# Altium PCB MoveH Messkette einseitig V2.PcbDoc
Units mm, origin at the board's own origin, x right, y up, seen from the top; angles counter-clockwise.
Board outline 66 x 63 mm, 2 copper layers (Top Layer, Bottom Layer); 70 components, 54 nets, 294 pads, 130 vias.
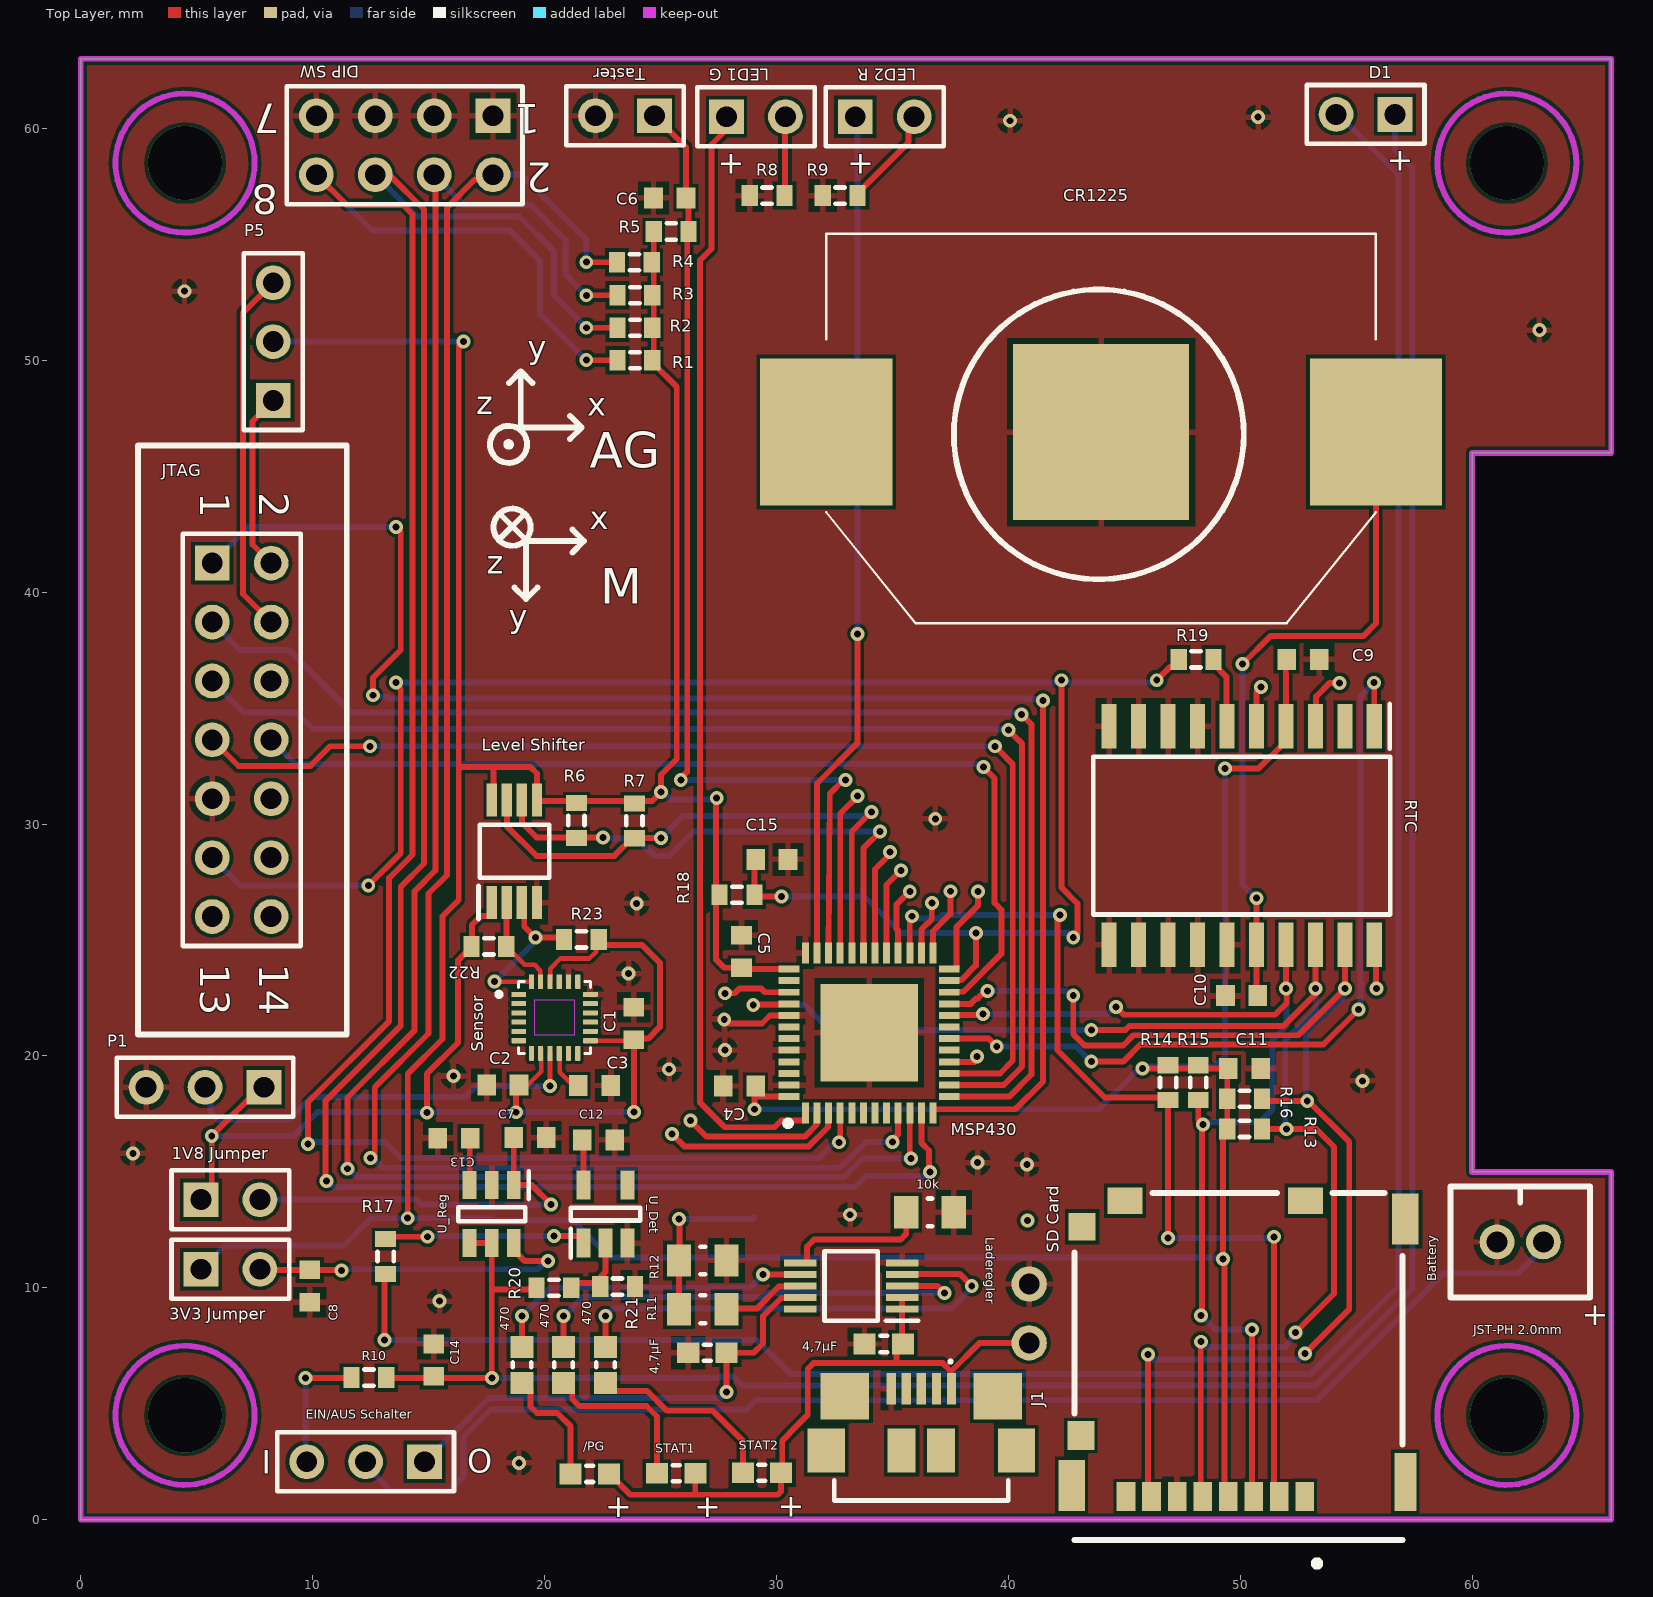
[diagram p0: Top Layer view]
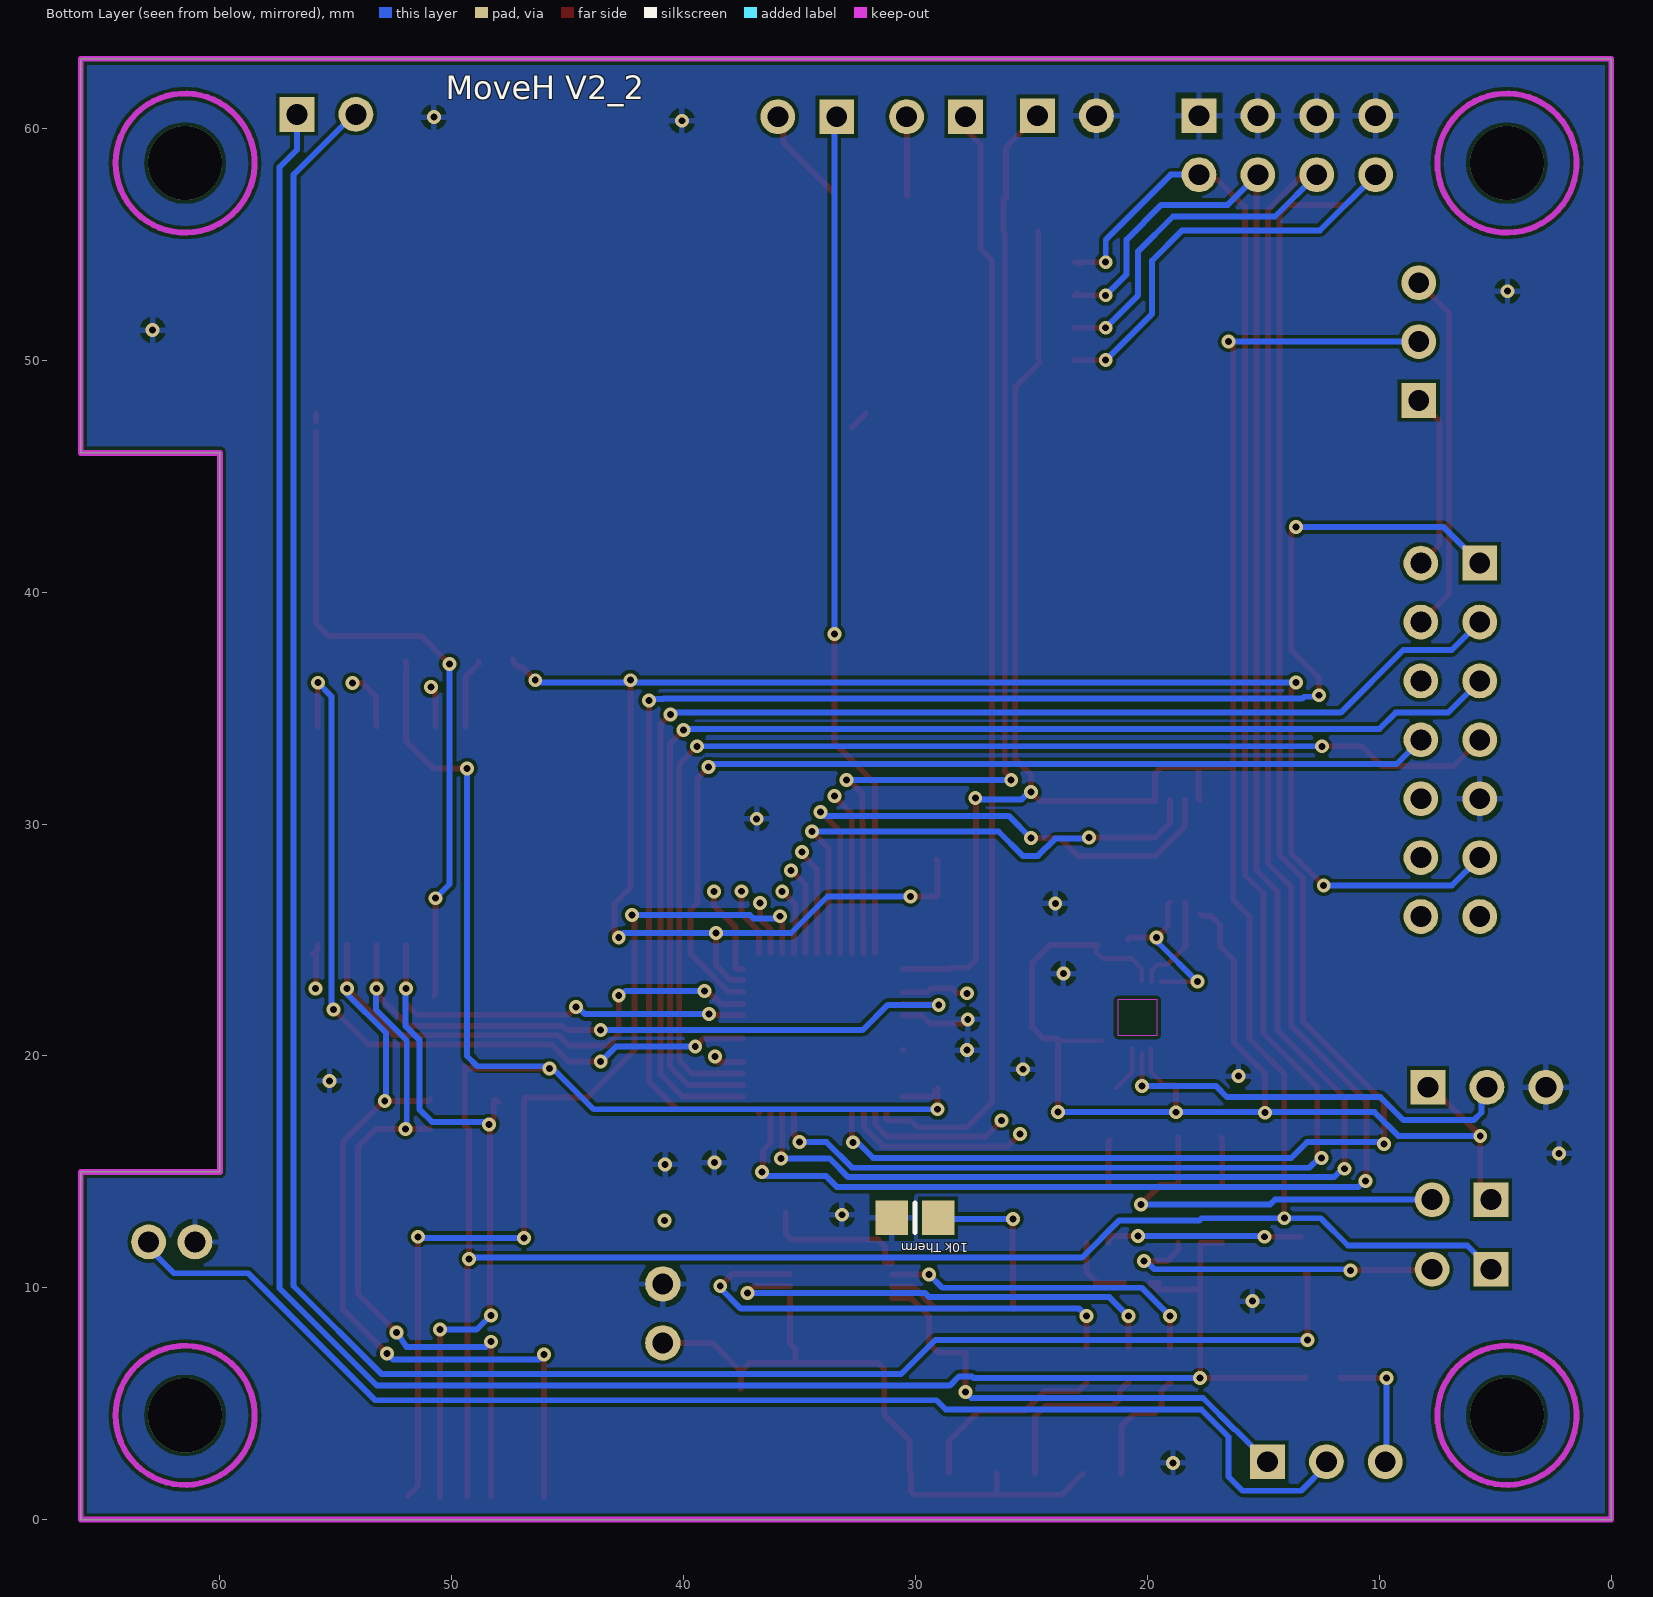
[diagram p1: Bottom Layer view, seen from below]

## Layer stack, top to bottom
Top Solder: solder mask 0.0102, Solder Resist, Dk 3.5
Top Layer: signal copper 0.0356
Dielectric 1: dielectric 0.32, FR-4, Dk 4.8
Bottom Layer: signal copper 0.0356
Bottom Solder: solder mask 0.0102, Solder Resist, Dk 3.5

## Board outline
60,15 66,15 66,0 0,0 0,63 66,63 66,46 60,46

## Design rules (kind name [scope] priority, off if disabled: settings)
Clearance [All] p1: gap=0.15 ignorepadtopadclearanceinfootprint=TRUE except(0.254: Arc-Via Track-Via)
HoleSize [All] p1: absolutevalues=TRUE maxlimit=3.3 minlimit=0.025 maxpercent=80.000 minpercent=20.000
MinimumSolderMaskSliver [All] p1: minsoldermaskwidth=0.04
PolygonConnect [All] p1: connectstyle=Relief reliefconductorwidth=0.254 reliefentries=4 polygonreliefangle="90 Angle" airgapwidth=0.254
RoutingVias [All] p1: holewidth=0.3 width=0.6 viastyle="Through Hole" minholewidth=0.3 minwidth=0.6 maxholewidth=0.3 maxwidth=0.6
SilkToSilkClearance [All] p1: silktosilkclearance=0.1
SilkToSolderMaskClearance [IsPad] p1: minsilkscreentomaskgap=0.1 clearancetoexposedcopper=TRUE
SolderMaskExpansion [All] p1: expansion=0.102
Width [All] p1: maxlimit=0.254 minlimit=0.2 preferedwidth=0.254
26 further rules are at their usual default settings.

## Classes and differential pairs
component class "POWER MANAGEMENT": "1V8 Jumper" "3V3 Jumper" 4,7µF 10k "10k Therm" 470 /PG Battery C7 C8 C12 C13 C14 D1 "EIN/AUS Schalter" J1 Laderegler R10 R11 R12 R17 R20 R21 STAT1 STAT2 U_Det U_Reg

## Components (designator, comment, footprint, x,y, rotation, side; value= is the part's Value field where it differs from the comment)
"1V8 Jumper" "Header 2" HDR1X2 5.185,13.8 r0 top
"3V3 Jumper" "Header 2" HDR1X2 5.185,10.8 r0 top
4,7µF "VJ0603" VJ0603 27.023,7.197 r180 top
4,7µF "VJ0603" VJ0603 34.623,7.577 r180 top
10k "RES 0805" D12CRCW0805 36.623,13.252 r180 top
"10k Therm" "10k Therm" 6-0805_M 30.025,13.025 r180 bottom value=1K
470 "RES 0603" "Vishay D11/CRCW0603 Resistor" 19.023,6.677 r90 top
470 "RES 0603" "Vishay D11/CRCW0603 Resistor" 22.623,6.677 r90 top
470 "RES 0603" "Vishay D11/CRCW0603 Resistor" 20.823,6.677 r90 top
/PG "LED SMD 0603" "SMD LED 0603" 21.95,1.975 r180 top
Battery "Header 2H" "JST-PH 2-Pin 2.0mm" 62.075,11.975 r180 top
C1 "Cap" 1608[0603] 23.85,21.4 r270 top value=100nF
C2 "Cap" 1608[0603] 18.2,18.745 r180 top value=100nF
C3 "Cap" 1608[0603] 22.15,18.725 r0 top value=100nF
C4 "Cap" 1608[0603] 28.4,18.7 r0 top value=100nF
C5 "Cap" 1608[0603] 28.5,24.5 r270 top value=100nF
C6 "Cap" 1608[0603] 25.4,57 r0 top value=40nF
C7 "Cap" 1608[0603] 19.375,16.475 r180 top value=2.2µF
C8 "Cap" 1608[0603] 9.875,10.077 r90 top value=2.2µF
C9 "Cap" 1608[0603] 52.7,37.1 r180 top value=100nF
C10 "Cap" 1608[0603] 50.065,22.6 r180 top value=100nF
C11 "Cap" 1608[0603] 50.19,19.45 r180 top value=100nF
C12 "Cap" 1608[0603] 22.323,16.377 r180 top value=100nF
C13 "Cap" 1608[0603] 16.1,16.45 r0 top value=10nF
C14 "Cap" 1608[0603] 15.223,6.877 r270 top value=2.2µF
C15 "Cap" 1608[0603] 29.8,28.475 r180 top value=2.2nF
CR1225 "12BH022-GR" 12BH022GR 44,46.9 r0 top
D1 "LED2" HDR1X2 56.675,60.6 r180 top
"DIP SW" "Header 4X2" HDR2X4 17.78,60.54 r180 top
"EIN/AUS Schalter" "EIN/AUS Schalter" HDR1X3 14.825,2.5 r180 top
J1 "ZX62R-B-5P_30_" ZX62R-B-5P(30) 36.25,0.825 r0 top
JTAG "Header 7X2" HDR2X7 5.671,41.249 r270 top
Laderegler "MCP73833-AMI_UN" SOP50P490X110-10N 33.223,10.077 r180 top
"LED1 G" "Header 2" HDR1X2 27.848,60.5 r0 top
"LED2 R" "Header 2" HDR1X2 33.4,60.5 r0 top
"Level Shifter" "PCA9508DP,118" SOP65P490X110-8N 18.7,28.825 r90 top
MSP430 "MSP430FR5969IRGZR" QFN50P700X700X100-49N-D 34,20.995 r90 top
P1 "Header 3" HDR1X3 7.9,18.65 r180 top
P5 "Header 3" HDR1X3 8.3,48.26 r90 top
R1 "Res3" J1-0603 23.9,50 r180 top value=10K
R2 "Res3" J1-0603 23.9,51.4 r180 top value=10K
R3 "Res3" J1-0603 23.9,52.8 r180 top value=10K
R4 "Res3" J1-0603 23.873,54.225 r180 top value=10K
R5 "Res3" J1-0603 25.463,55.552 r180 top value=100K
R6 "Res3" J1-0603 21.375,30.15 r270 top value=2K
R7 "Res3" J1-0603 23.875,30.14 r270 top value=2K
R8 "Res3" J1-0603 29.6,57.1 r180 top value=330
R9 "Res3" J1-0603 32.75,57.1 r180 top value=330
R10 "10" J1-0603 12.423,6.127 r180 top
R11 "RES 0805" D12CRCW0805 26.823,9.077 r0 top value=12k
R12 "RES 0805" D12CRCW0805 26.823,11.177 r180 top value=12k
R13 "Res3" J1-0603 50.19,16.85 r180 top value=10K
R14 "Res3" J1-0603 46.89,18.85 r90 top value=10K
R15 "Res3" J1-0603 48.19,18.85 r270 top value=10K
R16 "Res3" J1-0603 50.19,18.15 r0 top value=10K
R17 "Res3" J1-0603 13.15,11.35 r90 top value=330
R18 "Res3" J1-0603 28.3,26.95 r180 top value=47k
R19 "Res3" J1-0603 48.1,37.1 r0 top value=0
R20 "Res3" J1-0603 20.4,10 r0 top value=650
R21 "Res3" J1-0603 23.15,10.05 r180 top value=1K
R22 "Res3" J1-0603 17.6,24.725 r180 top value=2K
R23 "Res3" J1-0603 21.586,25.025 r0 top value=2K
RTC "DS3234S#" SOIC127P1032X265-20N 50.065,29.5 r270 top
"SD Card" "503182-1852" 5031821852 49.925,1.63 r180 top
Sensor "ICM-20948" QFN40P300X300X105-24N 20.434,21.655 r0 top
STAT1 "LED SMD 0603" "SMD LED 0603" 25.675,2 r180 top
STAT2 "LED SMD 0603" "SMD LED 0603" 29.375,2.025 r180 top
Taster "Header 2" HDR1X2 24.74,60.54 r180 top
U_Det "NCP302LSN20T1G" SOT95P275X110-5N 22.623,13.177 r90 top
U_Reg "MAX8882EUTA5+T" SOT95P280X145-6N 17.723,13.177 r270 top

## Footprints (in the part's own frame and the unit in brackets; to place one, negate y for a bottom-side part, rotate by r counter-clockwise, add the part's x,y. Pads: shape width x height; smd on the part's side, far side on the other; paste and mask are expansions set on the pad)
6-0805_M [mm] "Chip Resistor, Body 2.0x1.2mm, IPC Low Density"
  rect 1.4x1.5 smd: 1(-1,0) 2(1,0)
  silkscreen extent 0,-0.65 0,0.65, body extent -1.07,-0.7 1.07,0.7, height 0.7
12BH022GR [mm]
  rect 5.7x6.35 smd: 1(-11.85,0) 2(11.85,0)
  rect 7.6x7.6 smd: 3(0,0)
  silkscreen extent -11.85,-8.25 11.85,8.55, body extent -14.13,-8.25 14.13,8.55, height 4.1
1608[0603] [mm] "Chip Capacitor, Body 1.6x0.8mm, IPC High Density"
  rect 0.8x0.9 smd: 1(-0.7,0) 2(0.7,0)
  body extent -0.87,-0.48 0.87,0.48, height 1.3
5031821852 [mm]
  rect 0.8x1.24 smd: 1(-2.85,0.63) 2(-1.75,0.63) 3(-0.65,0.63) 4(0.45,0.63) 5(1.55,0.63) 6(2.65,0.63) 7(3.75,0.63) 8(4.85,0.63)
  rect 0.95x2.5 smd: 9(-7.195,0)
  rect 1.15x2.2 smd: 10(7.195,0.15) 15(-7.195,-11.33)
  rect 1.16x1.25 smd: 11(6.795,-2)
  rect 1.16x1.2 smd: 12(6.74,-11)
  rect 1.5x1.15 smd: 13(4.89,-12.125) 14(-2.89,-12.125)
  silkscreen extent -7.07,-12.45 7.07,3.66, body extent -7.47,-12.5 7.47,2.45, height 1.48
D12CRCW0805 [mm] "Chip Resistor, 2-Leads, Body 2,1x1,3mm, IPC Medium Density"
  rect 1.05x1.4 smd: 1(-1.025,0) 2(1.025,0)
  silkscreen extent -0.1,-0.6 0.1,0.6, body extent -1.1,-0.71 1.1,0.71, height 0.51
HDR1X2 [mm] "Connector; Header; 2 Position"
  rect 1.5x1.5 hole 0.9: 1(0,0)
  round 1.5 hole 0.9: 2(2.54,0)
  silkscreen extent -1.27,-1.27 3.81,1.27
HDR1X3 [mm] "Connector; Header; 3 Position"
  rect 1.5x1.5 hole 0.9: 1(0,0)
  round 1.5 hole 0.9: 2(2.54,0) 3(5.08,0)
  silkscreen extent -1.27,-1.27 6.35,1.27
HDR2X4 [mm] "Connector; Header; 4x2 Position"
  rect 1.5x1.5 hole 0.9: 1(0,0)
  round 1.5 hole 0.9: 2(0,2.54) 3(2.54,0) 4(2.54,2.54) 5(5.08,0) 6(5.08,2.54) 7(7.62,0) 8(7.62,2.54)
  silkscreen extent -1.27,-1.27 8.89,3.81
HDR2X7 [mm] "Connector; Header; 7x2 Position"
  rect 1.5x1.5 hole 0.9: 1(0,0)
  round 1.5 hole 0.9: 2(0,2.54) 3(2.54,0) 4(2.54,2.54) 5(5.08,0) 6(5.08,2.54) 7(7.62,0) 8(7.62,2.54) 9(10.16,0) 10(10.16,2.54) 11(12.7,0) 12(12.7,2.54) 13(15.24,0) 14(15.24,2.54)
  silkscreen extent -1.27,-1.27 16.51,3.81
J1-0603 [mm] "Chip Resistor, Body 1.6x0.8mm, IPC High Density"
  rect 0.7x0.9 smd: 1(-0.75,0) 2(0.75,0)
  silkscreen extent -0.2,-0.35 0.2,0.35, body extent -0.85,-0.48 0.85,0.48, height 0.9
"JST-PH 2-Pin 2.0mm" [mm]
  round 1.5 hole 0.9: 1(-1,0) 2(1,0)
  silkscreen extent -3,-2.4 3,2.4, body extent -3,-2.4 3,2.4, height 6.4
QFN40P300X300X105-24N [mm]
  rrect25% 0.64x0.22 smd: 1(-1.545,1) 2(-1.545,0.6) 3(-1.545,0.2) 4(-1.545,-0.2) 5(-1.545,-0.6) 6(-1.545,-1) 13(1.545,-1) 14(1.545,-0.6) 15(1.545,-0.2) 16(1.545,0.2) 17(1.545,0.6) 18(1.545,1)
  rrect25% 0.22x0.64 smd: 7(-1,-1.545) 8(-0.6,-1.545) 9(-0.2,-1.545) 10(0.2,-1.545) 11(0.6,-1.545) 12(1,-1.545) 19(1,1.545) 20(0.6,1.545) 21(0.2,1.545) 22(-0.2,1.545) 23(-0.6,1.545) 24(-1,1.545)
  Keep-Out Layer region: 0.85,-0.77 -0.85,-0.77 -0.85,0.77 0.85,0.77
  Keep-Out Layer region: 0.85,-0.77 -0.85,-0.77 -0.85,0.77 0.85,0.77
  silkscreen extent -2.5,-1.55 1.55,1.55
QFN50P700X700X100-49N-D [mm]
  rect 0.9x0.3 smd: 1(-3.45,2.75) 2(-3.45,2.25) 3(-3.45,1.75) 4(-3.45,1.25) 5(-3.45,0.75) 6(-3.45,0.25) 7(-3.45,-0.25) 8(-3.45,-0.75) 9(-3.45,-1.25) 10(-3.45,-1.75) 11(-3.45,-2.25) 12(-3.45,-2.75) 25(3.45,-2.75) 26(3.45,-2.25) 27(3.45,-1.75) 28(3.45,-1.25) 29(3.45,-0.75) 30(3.45,-0.25) 31(3.45,0.25) 32(3.45,0.75) 33(3.45,1.25) 34(3.45,1.75) 35(3.45,2.25) 36(3.45,2.75)
  rect 0.3x0.9 smd: 13(-2.75,-3.45) 14(-2.25,-3.45) 15(-1.75,-3.45) 16(-1.25,-3.45) 17(-0.75,-3.45) 18(-0.25,-3.45) 19(0.25,-3.45) 20(0.75,-3.45) 21(1.25,-3.45) 22(1.75,-3.45) 23(2.25,-3.45) 24(2.75,-3.45) 37(2.75,3.45) 38(2.25,3.45) 39(1.75,3.45) 40(1.25,3.45) 41(0.75,3.45) 42(0.25,3.45) 43(-0.25,3.45) 44(-0.75,3.45) 45(-1.25,3.45) 46(-1.75,3.45) 47(-2.25,3.45) 48(-2.75,3.45)
  rect 4.2x4.2 smd: 49(0,0)
  silkscreen extent -4.02,3.37 -3.78,3.62, body extent -3.55,-3.55 3.55,3.55, height 1
"SMD LED 0603" [mm] "Chip-Capacitor, 0603, found on Farnell"
  rect 0.95x0.9 smd: 1(-0.825,0) 2(0.825,0)
  silkscreen extent -0.15,-0.35 0.15,0.35, body extent -1.11,-0.43 1.11,0.42, height 1
SOIC127P1032X265-20N [mm]
  rect 1.925x0.65 smd: 1(-4.712,5.715) 2(-4.712,4.445) 3(-4.712,3.175) 4(-4.712,1.905) 5(-4.712,0.635) 6(-4.712,-0.635) 7(-4.712,-1.905) 8(-4.712,-3.175) 9(-4.712,-4.445) 10(-4.712,-5.715) 11(4.712,-5.715) 12(4.712,-4.445) 13(4.712,-3.175) 14(4.712,-1.905) 15(4.712,-0.635) 16(4.712,0.635) 17(4.712,1.905) 18(4.712,3.175) 19(4.712,4.445) 20(4.712,5.715)
  silkscreen extent -5.68,-6.4 3.4,6.4, body extent -5.16,-6.4 5.16,6.4, height 2.65
SOP50P490X110-10N [mm]
  rect 1.4x0.3 smd: 1(-2.2,1) 2(-2.2,0.5) 3(-2.2,0) 4(-2.2,-0.5) 5(-2.2,-1) 6(2.2,-1) 7(2.2,-0.5) 8(2.2,0) 9(2.2,0.5) 10(2.2,1)
  silkscreen extent -2.9,-1.5 1.15,1.5, body extent -2.45,-1.5 2.45,1.5, height 1.1
SOP65P490X110-8N [mm]
  rect 1.425x0.45 smd: 1(-2.212,0.975) 2(-2.212,0.325) 3(-2.212,-0.325) 4(-2.212,-0.975) 5(2.212,-0.975) 6(2.212,-0.325) 7(2.212,0.325) 8(2.212,0.975)
  silkscreen extent -2.93,-1.5 1.15,1.55, body extent -2.45,-1.5 2.45,1.5, height 1.1
SOT95P275X110-5N [mm]
  rect 1.25x0.6 smd: 1(-1.25,0.95) 2(-1.25,0) 3(-1.25,-0.95) 4(1.25,-0.95) 5(1.25,0.95)
  silkscreen extent -1.88,-1.5 0.28,1.5, body extent -1.38,-1.5 1.38,1.5, height 1.1
SOT95P280X145-6N [mm]
  rect 1.2x0.6 smd: 1(-1.25,0.95) 2(-1.25,0) 3(-1.25,-0.95) 4(1.25,-0.95) 5(1.25,0) 6(1.25,0.95)
  silkscreen extent -1.85,-1.45 0.3,1.6, body extent -1.4,-1.45 1.4,1.45, height 1.45
"Vishay D11/CRCW0603 Resistor" [mm] "Chip Resistor, 2-Leads, Body 1,6x0,8mm, IPC Medium Density"
  rect 0.95x1 smd: 1(-0.775,0) 2(0.775,0)
  silkscreen extent -0.1,-0.4 0.1,0.4, body extent -0.82,-0.51 0.82,0.44, height 0.55
VJ0603 [mm] "Ceramic Chip Capacitor Vishay Vitramon"
  rect 0.95x0.9 smd: 1(-0.825,0) 2(0.825,0)
  silkscreen extent -0.15,-0.35 0.15,0.35, body extent -0.74,-0.39 0.74,0.41, height 0.94
ZX62R-B-5P(30) [mm]
  rect 0.4x1.35 smd: 1(1.3,4.825) 2(0.65,4.825) 3(0,4.825) 4(-0.65,4.825) 5(-1.3,4.825)
  rect 2.1x2 smd: 6(-3.3,4.5) 7(3.3,4.5)
  rect 1.6x1.9 smd: 8(-4.1,2.15) 9(4.1,2.15)
  rect 1.2x1.9 smd: 10(-0.85,2.15) 11(0.85,2.15)
  silkscreen extent -3.75,0 3.75,6.02, body extent -3.1,-0.23 5.7,2.71, height 5.6

## Part data
"1V8 Jumper" "3V3 Jumper" "LED1 G" "LED2 R" Taster: "Header, 2-Pin", LatestRevisionDate=17-Jul-2002, LatestRevisionNote="Re-released for DXP Platform.", Publisher="Altium Limited"
4,7µF 4,7µF: "Ceramic Chip Capacitor Vishay Vitramon", Supplier Part Number 1=1650946, Supplier 1=Farnell
10k R11 R12: "Chip Resistor 0805", Supplier Part Number 1=1738935, Fitted=False, Supplier 1=Farnell
"10k Therm": library part Res1, "Resistor", LatestRevisionDate=17-Jul-2002, LatestRevisionNote="Re-released for DXP Platform.", PackageDescription="Axial Device, Thru-Hole; 2 Leads; 0.3 in Pin Spacing", PackageReference=AXIAL-0.3, Published=8-Jun-2000, Publisher="Altium Limited"
470 470 470: "Chip Resistor 0603", Supplier Part Number 1=1738901RL, Fitted=False, Supplier 1=Farnell
Battery: "Header, 2-Pin, Right Angle", LatestRevisionDate=17-Jul-2002, LatestRevisionNote="Re-released for DXP Platform.", Publisher="Altium Limited"
C1 C2 C3 C4 C5 C6 C7 C8 C9 C10 C11 C12 C13 C14 C15: "Capacitor", LatestRevisionDate=17-Jul-2002, LatestRevisionNote="Re-released for DXP Platform.", PackageDescription="Radial Cap, Thru-Hole; 2 Leads; 0.3 in Pin Spacing", PackageReference=RAD-0.3, Published=8-Jun-2000, Publisher="Altium Limited"
CR1225: "Hardware", Manufacturer_Name="Eagle Plastic Devices", Datasheet Link=https://componentsearchengine.com//12BH022-GR.pdf, Height=4mm, Manufacturer_Part_Number=12BH022-GR, Mouser2 Part Number=12BH022-GR, Mouser2 Price/Stock=https://www.mouser.com/Search/Refine.aspx?Keyword=12BH022-GR
D1: "Typical RED, GREEN, YELLOW, AMBER GaAs LED", LatestRevisionDate=17-Jul-2002, LatestRevisionNote="Re-released for DXP Platform.", PackageDescription="SM LED; 2 Flat Leads", PackageReference=3.2X1.6X1.1, PackageVersion=Feb-2002, Published=8-Jun-2000, Publisher="Altium Limited"
"DIP SW": "Header, 4-Pin, Dual row", LatestRevisionDate=17-Jul-2002, LatestRevisionNote="Re-released for DXP Platform.", Publisher="Altium Limited"
"EIN/AUS Schalter": library part "Header 3H", "Header, 3-Pin, Right Angle", LatestRevisionDate=17-Jul-2002, LatestRevisionNote="Re-released for DXP Platform.", Publisher="Altium Limited"
J1: "Connector", Manufacturer_Name=Hirose, Manufacturer_Part_Number=ZX62R-B-5P(30)
JTAG: "Header, 7-Pin, Dual row", LatestRevisionDate=17-Jul-2002, LatestRevisionNote="Re-released for DXP Platform.", Publisher="Altium Limited"
Laderegler: "Integrated Circuit", Manufacturer_Name=Microchip, Manufacturer_Part_Number=MCP73833-AMI/UN, Mouser2 Part Number=579-MCP73833-AMI/UN, Datasheet Link=https://componentsearchengine.com//MCP73833-AMI_UN.pdf, Height=1.1mm, Mouser2 Price/Stock=https://www.mouser.com/Search/Refine.aspx?Keyword=579-MCP73833-AMI%2FUN
"Level Shifter": "Integrated Circuit", Manufacturer_Name=NXP, Datasheet Link=http://www.nxp.com/docs/en/data-sheet/PCA9508.pdf, Height=1.1mm, Manufacturer_Part_Number=PCA9508DP,118
MSP430: "Integrated Circuit", Manufacturer_Name="Texas Instruments", Datasheet Link=http://www.ti.com/lit/gpn/msp430fr5969, Height=1mm, Manufacturer_Part_Number=MSP430FR5969IRGZR
P1 P5: "Header, 3-Pin", LatestRevisionDate=17-Jul-2002, LatestRevisionNote="Re-released for DXP Platform.", Publisher="Altium Limited"
R1 R2 R3 R4 R5 R6 R7 R8 R9 R13 R14 R15 R16 R17 R18 R19 R20 R21 R22 R23: "Resistor", LatestRevisionDate=29-May-2009, LatestRevisionNote="IPC-7351 Footprint Added.", PackageDescription="Chip Resistor", PackageReference=J1-0603, Published=8-Jun-2000, Publisher="Altium Limited"
R10: library part Res3, "Resistor", LatestRevisionDate=29-May-2009, LatestRevisionNote="IPC-7351 Footprint Added.", PackageDescription="Chip Resistor", PackageReference=J1-0603, Published=8-Jun-2000, Publisher="Altium Limited"
RTC: "Integrated Circuit", Manufacturer_Name="Maxim Integrated", Mouser2 Part Number=700-DS3234S#, Datasheet Link=https://componentsearchengine.com//DS3234S#.pdf, Height=2.65mm, Manufacturer_Part_Number=DS3234S#, Mouser2 Price/Stock=https://www.mouser.com/Search/Refine.aspx?Keyword=700-DS3234S%23
"SD Card": "Connector", Manufacturer_Name=Molex, Mouser2 Part Number=538-503182-1852, Datasheet Link=https://componentsearchengine.com//503182-1852.pdf, Manufacturer_Part_Number=503182-1852, Mouser2 Price/Stock=https://www.mouser.com/Search/Refine.aspx?Keyword=538-503182-1852
Sensor: "Accelerometer, Gyroscope, Magnetometer, 9 Axis Sensor I²C, SPI Output", Package="TFQFN-24 TDK InvenSense", Availability=Unavailable, MF="TDK InvenSense", MP=ICM-20948, Price=None, SnapEDA_Link=https://www.snapeda.com/parts/ICM-20948/TDK%20InvenSense/view-part/4218863/?ref=snap
U_Det: "Integrated Circuit", Manufacturer_Name="ON Semiconductor", Datasheet Link=http://www.onsemi.com/pub/Collateral/NCP302-D.PDF, Height=1.1mm, Manufacturer_Part_Number=NCP302LSN20T1G
U_Reg: "Integrated Circuit", Manufacturer_Name="Maxim Integrated", Datasheet Link=https://pdfserv.maximintegrated.com/en/ds/MAX8882-MAX8883.pdf, Height=1.45mm, Manufacturer_Part_Number=MAX8882EUTA5+T

## Free pads (board coordinates)
  round 1.524 hole 0.9: 2(40.9,7.625) 2(40.9,10.165)

## Via types
v1: diameter 0.6, hole 0.3, Top Layer to Bottom Layer, 126 vias
v2: diameter 3.2, hole 3.2, Top Layer to Bottom Layer, 4 vias

## Nets (pads, with @x,y where several pads share a name; then routed paths per layer and width w, separated by ;. In a path a pad name is that pad's centre, name@x,y a point inside that pad or via, vN(x,y) a via of type N, cw(c..) or ccw(c..) an arc to the next point about the centre after c; other vN are vias at no path point)
1,8V: "1V8 Jumper.1" "Level Shifter.1" C1.2 C2.1 P1.1 R22.2 R23.2 Sensor.8 Sensor.13 Sensor.22 | length 53.5
  Top Layer w0.2: C2.1@18.798,18.643 C2.1@18.798,18.745 ; C2.1 19.274,18.745 19.857,19.328 Sensor.8@19.857,20.31 ; Sensor.22@20.247,23.213 20.247,23.765 20.682,24.2 21.925,24.2 22.225,24.5 R23.2@22.225,24.775 ; Sensor.13 C1.2@23.805,20.655
  Top Layer w0.254: 5.275,13.8 5.65,14.175 v1(5.65,16.55) 7.75,18.65 P1.1 ; v1(14.925,17.55) 14.925,19.225 16.275,20.575 16.275,24.125 16.875,24.725 16.875,25.656 17.246,26.027 17.627,26.027 17.725,26.126 ; v1(18.775,17.57) 18.775,18.62 18.798,18.643 C2.1 ; R23.2@22.15,24.788 24.198,24.788 24.975,24.011 24.975,21.252 24.468,20.745 23.895,20.745 C1.2 ; C1.2@23.805,20.655 C1.2 ; v1(23.85,17.575) C1.2
  Bottom Layer w0.254: v1(5.65,16.55) 9.187,16.55 10.212,17.575 v1(23.85,17.575)
3,3V: "3V3 Jumper.1" "Level Shifter.5" "Level Shifter.8" "SD Card.4" C4.2 C5.2 C9.2 C11.2 MSP430.37 MSP430.48 P5.2 R1.1 R2.1 R3.1 R4.1 R5.2 R6.1 R7.1 R13.2 R14.2 R15.1 R16.1 R18.2 RTC.4 | length 207.3
  Top Layer w0.254: v1(14.1,13) 14.1,19.225 15.6,20.725 15.6,26.022 16.3,26.722 16.3,32.35 ; v1(16.5,50.8) 16.3,50.6 16.3,32.35 ; 17.725,31.037 17.804,31.116 17.804,32.379 17.875,32.45 ; 19.675,30.989 21.988,30.989 ; 19.675,31.037 19.675,32.175 19.4,32.45 17.875,32.45 ; 22,31 21.988,30.989 ; R1.1@24.65,49.9 25.7,48.85 25.7,32.8 25.025,32.125 v1(25.025,31.375) 24.639,30.989 21.988,30.989 ; R1.1@24.711,50.061 24.711,54.225 24.711,55.55 R5.2 ; v1@27.4,31.116 27.4,24.145 27.745,23.8 C5.2 28.555,23.745 MSP430.37 ; v1(29.05,17.7) 29.05,18.358 29.146,18.454 29,18.6 29.05,18.6 29.171,18.479 29.171,18.245 MSP430.48 ; v1(45.79,19.45) 49.29,19.45 49.39,19.35 C11.2@49.44,19.4 ; v1@49.3,32.4 v1(49.34,32.4) 50.796,32.4 51.97,33.574 RTC.4 51.97,36.495 51.965,36.5 51.965,36.965 C9.2@52,37 ; 49.325,1 49.325,11.25 49.25,11.325 49.25,16.815 49.44,17.005 C11.2@49.44,19.4 ; C11.2@49.44,19.555 C11.2@49.44,19.4 ; 16.3,32.35 16.4,32.45 17.875,32.45
  Bottom Layer w0.254: 5.185,10.8 6.212,11.827 11.352,11.827 12.525,13 v1(14.1,13) 17.659,13 17.753,12.907 21.218,12.907 22.825,11.3 v1@49.25,11.3 ; P5.2 v1(16.5,50.8) ; v1(25.025,31.375) 25.119,31.375 25.444,31.05 v1@27.4,31.05 ; v1(29.05,17.7) 43.885,17.7 45.74,19.555 48.9,19.555 49.34,19.995 v1(49.34,32.4)
  other v1: 49.25,11.25 27.425,31.116
/PG: 470.2@19.023,7.452 Laderegler.7 | length 14.1
  Top Layer w0.254: 470.2@19.023,7.452 v1(19.023,8.777) ; v1(29.423,10.577) Laderegler.7
  Bottom Layer w0.254: v1(19.023,8.777) 20.246,10 28.846,10 v1(29.423,10.577)
"Battery Output": C14.2 D1.1 R10.1 R20.1 U_Reg.4 U_Reg.5 | length 106.5
  Top Layer w0.254: R10.1 13.198,6.102 16.393,6.102 ; 16.401,6.102 v1(17.731,6.102) 17.725,6.108 17.725,9.925 ; U_Reg.4 U_Reg.5@17.719,11.927 ; U_Reg.5 U_Reg.5@17.719,11.927 ; R20.1@19.5,10.2 19.875,10.2 19.6,9.925 17.725,9.925 ; U_Reg.5@17.719,11.927 17.723,11.923 17.723,10.577 17.725,10.575 17.725,9.925
  Bottom Layer w0.254: v1(17.731,6.102) 27.487,6.102 27.566,6.181 28.13,6.181 28.529,5.782 53.226,5.782 57.425,9.981 57.425,11.325 57.425,56.275 57.425,58.325 56.675,59.075 D1.1
GND: 4,7µF.2 10k.1 "10k Therm.1" "DIP SW.1" "DIP SW.3" "DIP SW.5" "DIP SW.7" "Level Shifter.4" "SD Card.6" Battery.2 C1.1 C2.2 C3.2 C4.1 C5.1 C6.1 C7.1 C8.1 C9.1 C10.2 C11.1 C12.1 C13.1 C14.1 C15.1 CR1225.3 J1.5 JTAG.9 Laderegler.5 MSP430.36 MSP430.41 MSP430.44 MSP430.47 MSP430.49 P1.3 pad.2@40.9,10.165 R8.2 R9.2 R12.1 R21.1 RTC.7 RTC.8 RTC.9 RTC.10 RTC.11 RTC.12 RTC.13 RTC.14 RTC.15 Sensor.18 Sensor.20 Taster.2 U_Det.3 U_Reg.2 | length 3
  Top Layer w0.254: v1(27.75,21.575) 27.925,21.4 29.375,21.4 29.72,21.745 MSP430.41 ; MSP430.44@30.535,20.26 MSP430.44
  other v1: 18.9,2.45 15.475,9.425 33.175,13.15 40.8,15.325 38.675,15.4 2.25,15.8 55.275,18.925 16.075,19.125 25.375,19.425 27.775,20.25 23.625,23.55 23.975,26.575 36.85,30.225 62.9,51.3 4.475,52.975 40.075,60.325 50.775,60.481
Ladespannung: 4,7µF.1@35.448,7.577 /PG.1 J1.1 Laderegler.1 Laderegler.2 pad.2@40.9,7.625 STAT1.1 STAT2.1 | length 28.6
  Top Layer w0.254: /PG.1 22.8,1.975 23.7,1.075 26.525,1.075 ; STAT1.1 26.5,1.1 26.525,1.075 ; Laderegler.2 35.423,9.1 35.446,9.077 Laderegler.1 35.423,7.602 35.173,7.352 35.173,6.75 ; J1.1 37.531,5.669 37.531,6.394 ; pad.2@40.9,7.625 38.762,7.625 37.531,6.394 ; 26.525,1.075 30.051,1.075 30.2,1.224 STAT2.1 30.25,2.075 30.25,3.4 30.573,3.723 30.573,3.748 31.35,4.525 31.35,6.5 31.6,6.75 35.173,6.75 ; 35.173,6.75 37.175,6.75 37.531,6.394
"LED1 Anode": "LED1 G.1" MSP430.1 | length 48.4
  Top Layer w0.254: 27.848,60.5 27.848,59.948 27.2,59.3 27.2,54.8 26.7,54.3 26.7,36.9 26.7,18 27.777,16.923 29.918,16.923 30.216,17.222 31.227,17.222 31.25,17.245 MSP430.1
"LED2 Anode": "LED2 R.1" MSP430.35 | length 36.8
  Top Layer w0.254: MSP430.35 31.75,31.75 33.5,33.5 v1(33.5,38.2)
  Bottom Layer w0.254: v1(33.5,38.2) 33.5,60.5
"Net1V8 Jumper_2": "1V8 Jumper.2" C7.2 U_Reg.1 | length 16.5
  Top Layer w0.254: C7.2 18.673,16.473 U_Reg.1 19.448,14.427 v1(20.275,13.6)
  Bottom Layer w0.254: 7.815,13.8 14.503,13.8 14.703,13.6 v1(20.275,13.6)
"Net3V3 Jumper_2": "3V3 Jumper.2" C8.2 U_Reg.6 | length 14.7
  Top Layer w0.254: 7.725,10.8 7.75,10.775 11.225,10.775 v1(11.25,10.75) ; U_Reg.6 18.673,11.627 19.15,11.15 v1(20.15,11.15)
  Bottom Layer w0.254: v1@11.125,10.8 19.706,10.8 20.056,11.15 v1(20.15,11.15)
Net4,7µF_1: 4,7µF.1@27.848,7.197 "EIN/AUS Schalter.1" Laderegler.9 | length 20.8
  Top Layer w0.254: v1(27.848,5.5) 27.848,7.197 29.023,7.197 29.423,7.597 29.423,8.777 30.2,9.554 31,9.554 Laderegler.9
  Bottom Layer w0.254: 14.825,2.5 16.202,3.877 16.231,3.877 17.604,5.25 27.598,5.25 v1(27.848,5.5)
"Net10k Therm_2": "10k Therm.2" R11.1 R12.2 | length 7.1
  Top Layer w0.254: R11.1 R12.2 25.813,11.192 v1@25.813,12.975
  Bottom Layer w0.254: v1(25.8,12.975) 28.975,12.975 29.025,13.025
Net10k_2: 10k.2 Laderegler.6 | length 6.4
  Top Layer w0.254: Laderegler.6 31.3,11.077 31.323,11.1 31.323,11.777 31.623,12.077 35.35,12.077 35.598,12.325 10k.2
Net470_1: 470.1@20.823,5.902 STAT1.2 | length 7.3
  Top Layer w0.254: 470.1@20.823,5.902 20.848,5.902 21.196,5.554 21.196,5.204 21.5,4.9 24.4,4.9 24.85,4.45 STAT1.2
Net470_1: 470.1@22.623,5.902 STAT2.2 | length 8.3
  Top Layer w0.254: 470.1@22.623,5.902 22.971,5.554 24.421,5.554 25.275,4.7 27.25,4.7 28.55,3.4 STAT2.2
Net/PG_2: 470.1@19.023,5.902 /PG.2 | length 5.3
  Top Layer w0.254: 470.1@18.998,5.902 19.023,5.902 19.048,5.902 19.396,5.554 19.396,4.879 19.675,4.6 20.548,4.6 21.125,4.023 /PG.2
NetBattery_1: "EIN/AUS Schalter.2" Battery.1 | length 57
  Bottom Layer w0.254: 12.285,2.5 12.285,2.34 13.375,1.25 15.899,1.25 16.502,1.853 16.502,3.577 17.675,4.75 28.7,4.75 29.1,5.15 53.3,5.15 58.775,10.625 61.975,10.625 63.075,11.725 Battery.1
NetC3_1: C3.1 Sensor.10 | length 2
  Top Layer w0.2: Sensor.10@20.657,20.31 20.657,19.293 C3.1@21.338,18.613
NetC10_1: C10.1 CR1225.2 RTC.16 | length 29.6
  Top Layer w0.254: v1(50.1,36.9) 51.3,38.1 55.3,38.1 55.85,38.65 CR1225.2 ; v1(50.7,26.8) RTC.16 50.7,22.665 C10.1 ; CR1225.2@55.85,47.375 CR1225.2@55.85,47.7
  Bottom Layer w0.254: v1@50.09,36.91 v1(50.1,36.9) 50.1,27.4 v1(50.7,26.8)
NetC12_2: C12.2 U_Det.5 | length 2
  Top Layer w0.254: C12.2 21.673,16.327 U_Det.5
NetC13_2: C13.2 U_Reg.3 | length 2.1
  Top Layer w0.254: U_Reg.3 16.773,16.427 C13.2@16.823,16.477
NetC15_2: C15.2 JTAG.11 MSP430.23 R18.1 R19.1 | length 81.5
  Top Layer w0.254: JTAG.11@5.361,28.549 JTAG.11 ; v1(12.4,27.345) 13.8,28.745 13.8,35.806 13.6,36.006 v1(13.6,36.1) ; C15.2 29.05,28.425 R18.1 29.125,26.875 v1(30.225,26.875) ; MSP430.23 37.473,23.268 37.965,23.268 38.6,23.903 v1(38.6,25.3) ; v1(42.3,36.2) 42.3,27.25 42.975,26.575 42.975,25.275 v1(42.8,25.1) ; v1(46.4,36.2) 46.977,36.777 47.127,36.777 47.35,37 R19.1
  Bottom Layer w0.254: JTAG.11 6.875,27.345 v1(12.4,27.345) ; v1(13.6,36.1) 42.1,36.1 v1@46.3,36.1 ; v1@30.1,26.875 v1(30.225,26.875) 33.8,26.875 35.375,25.3 v1(38.6,25.3) 42.6,25.3 v1(42.8,25.1)
NetD1_2: D1.2 R17.1 | length 100.4
  Top Layer w0.254: v1(13.1,7.75) 13.1,10.669 R17.1@13.194,10.575
  Bottom Layer w0.254: v1(13.1,7.75) 29.15,7.75 30.625,6.275 53.025,6.275 56.825,10.075 56.825,58 54.535,60.29 D1.2@54.535,60.575
"NetDIP SW_2": "DIP SW.2" MSP430.9 R4.2 | length 76.8
  Top Layer w0.254: v1@12.68,15.7 12.68,18.645 15,20.965 15,27 15.8,27.8 15.8,56.6 17,57.8 17.58,57.8 17.78,58 ; v1(21.8,54.225) R4.2 ; R4.2@22.923,54.15 R4.2@22.973,54.2 ; v1(35,16.282) 35,16.376 35.25,16.626 MSP430.9
  Bottom Layer w0.254: v1(12.5,15.6) 12.594,15.6 13.018,15.175 13.2,15.175 32.733,15.175 33.839,16.282 v1(35,16.282) ; 17.78,58 19,58 21.8,55.2 v1(21.8,54.225)
"NetDIP SW_4": "DIP SW.4" MSP430.10 R3.2 | length 82.4
  Top Layer w0.254: v1(11.5,15.134) 11.5,18.202 14.398,21.1 14.398,27.098 15.3,28 15.3,57.94 15.24,58 ; v1(21.8,52.8) R3.2 R3.2@23.05,52.9 ; MSP430.10@35.773,17.522 MSP430.10 35.75,15.625 v1(35.8,15.575)
  Bottom Layer w0.254: v1(11.5,15.134) 11.594,15.134 11.956,14.771 12.155,14.771 32.9,14.771 33.704,15.575 v1(35.8,15.575) ; 15.24,58 16.54,56.7 19.4,56.7 20.9,55.2 20.9,53.7 v1(21.8,52.8)
"NetDIP SW_6": "DIP SW.6" MSP430.11 R2.2 | length 89.4
  Top Layer w0.254: v1@10.56,14.74 10.56,18.06 13.8,21.3 13.8,27.3 14.8,28.3 14.8,56.5 13.3,58 12.7,58 ; v1(21.8,51.4) R2.2 ; MSP430.11 36.25,16.25 36.58,15.92 36.58,15.045 v1(36.625,15)
  Bottom Layer w0.254: v1@10.774,14.48 10.9,14.354 11.7,14.354 33.254,14.354 33.4,14.354 33.871,14.825 36.45,14.825 v1(36.625,15) ; 12.7,58 14.5,56.2 18.9,56.2 20.4,54.7 20.4,52.8 v1(21.8,51.4)
  other v1: 10.6,14.6
"NetDIP SW_8": "DIP SW.8" MSP430.4 R1.2 | length 89.1
  Top Layer w0.254: v1(9.8,16.2) 9.8,18 13.3,21.5 13.3,27.674 14.304,28.678 14.304,56.296 13.9,56.7 11.46,56.7 10.16,58 ; v1(21.8,50) R1.2 ; v1@32.75,16.477 MSP430.4
  Bottom Layer w0.254: v1(9.8,16.2) 9.881,16.281 13.119,16.281 13.8,15.6 31.829,15.6 32.656,16.427 v1@32.75,16.427 ; 10.16,58 12.56,55.6 18.5,55.6 19.8,54.3 19.8,52 v1(21.8,50)
  other v1: 32.7,16.275
"NetEIN/AUS Schalter_3": "EIN/AUS Schalter.3" R10.2 | length 5.6
  Top Layer w0.254: v1(9.698,6.102) 11.648,6.102 R10.2
  Bottom Layer w0.254: v1(9.698,6.102) 9.698,2.547 9.745,2.5
NetLaderegler_8: Laderegler.8 R11.2 | length 3.6
  Top Layer w0.254: R11.2 27.871,9.1 29.146,9.1 30.1,10.054 31,10.054 Laderegler.8
"NetLED1 G_2": "LED1 G.2" R8.1 | length 3.5
  Top Layer w0.254: R8.1@30.325,57.125 R8.1 30.369,57.119 30.369,60.481 30.388,60.5 30.413,60.475
"NetLED2 R_2": "LED2 R.2" R9.1 | length 4.5
  Top Layer w0.254: R9.1 33.5,57.2 35.702,59.402 35.702,60.262 35.94,60.5 35.995,60.445
"NetLevel Shifter_6": "Level Shifter.6" MSP430.31 R6.2 | length 23
  Top Layer w0.254: 19.025,31.037 19.025,30.05 19.65,29.425 v1(22.525,29.425) ; MSP430.31 33.75,28.95 v1(34.475,29.675)
  Bottom Layer w0.254: v1(22.525,29.425) 22.581,29.369 23.981,29.369 24.725,28.625 25.375,28.625 26.425,29.675 v1(34.475,29.675)
"NetLevel Shifter_7": "Level Shifter.7" MSP430.32 R7.2 | length 24.6
  Top Layer w0.254: 18.375,31.037 18.375,29.9 19.65,28.625 23.011,28.625 23.775,29.39 R7.2 v1(25.025,29.39) ; MSP430.32 33.25,29.675 v1(34.1,30.525)
  Bottom Layer w0.254: v1(25.025,29.39) 25.985,30.35 33.925,30.35 v1(34.1,30.525)
NetMSP430_18: MSP430.18 RTC.1 | length 35.3
  Top Layer w0.254: MSP430.18 39.155,20.745 v1(39.5,20.4) ; v1(43.577,19.751) 44.951,19.751 45.688,20.488 53.587,20.488 v1(55.1,22.001) ; v1@55.765,36.1 v1(55.772,36.092) 55.78,36.085 RTC.1
  Bottom Layer w0.254: v1(39.5,20.4) 42.928,20.4 v1(43.577,19.751) ; v1(55.1,22.001) 55.191,22.092 55.191,35.511 v1(55.772,36.092)
NetMSP430_20: "SD Card.3" MSP430.20 R15.2 RTC.17 | length 45.2
  Top Layer w0.254: MSP430.20 37.473,21.768 38.868,21.768 v1(38.9,21.8) ; v1(44.65,22.1) 44.975,21.775 51.496,21.775 52.005,22.284 v1@52.005,22.7 ; R15.2@47.99,18 R15.2@48.09,18.1 ; R15.2 48.19,17.25 48.315,17.115 v1@48.35,17.085 ; v1(48.315,8.802) 48.35,8.837 v1@48.35,17.085 ; v1@48.34,17.155 48.35,17.145 v1@48.35,17.085 ; v1(48.39,17.05) v1@48.35,17.085 ; 50.5,1 v1(50.5,8.2) ; v1(51.97,22.9) RTC.17
  Bottom Layer w0.254: v1(38.9,21.8) 38.904,21.804 44.26,21.804 44.556,22.1 v1(44.65,22.1) ; v1(48.315,8.802) 48.927,8.2 v1(50.5,8.2) ; v1@48.34,17.155 50.855,17.155 51.4,17.7 51.4,20.7 52,21.3 52,22.695 v1@52.005,22.7
NetMSP430_21: "SD Card.7" MSP430.21 R16.2 RTC.19 | length 55
  Top Layer w0.254: MSP430.21 38.382,22.245 38.618,22.481 38.687,22.481 39.006,22.8 v1(39.1,22.8) ; v1(42.8,22.598) 42.8,20.937 43.295,20.442 44.942,20.442 45.392,20.892 52.502,20.892 v1(54.51,22.9) RTC.19 ; 46.025,1 v1(46.025,7.125) ; R16.2 51.04,18.05 v1(52.89,18.05) ; v1(52.8,7.175) 54.7,9.075 54.7,16.295 v1@52.84,18.155
  Bottom Layer w0.254: v1(39.1,22.8) 42.505,22.8 42.706,22.598 v1(42.8,22.598) ; v1(46.025,7.125) 46.25,6.9 52.525,6.9 v1(52.8,7.175) ; v1@52.84,18.155 52.84,20.995 v1@54.545,22.7
NetMSP430_27: "SD Card.2" MSP430.27 R14.1 | length 41.4
  Top Layer w0.254: MSP430.27 35.75,25.825 35.854,25.929 v1(35.854,26.023) ; v1(42.225,26.075) 42.119,25.969 42.119,20.246 44.16,18.205 R14.1@46.84,18.205 ; v1(46.89,12.15) R14.1 ; v1(51.45,12.2) 51.45,1.475 51.9,1.025
  Bottom Layer w0.254: v1(35.854,26.023) 35.929,25.948 35.929,25.919 36.982,25.919 37.138,26.075 v1(42.225,26.075) ; v1(46.89,12.15) 51.4,12.15 v1(51.45,12.2)
NetMSP430_40: "SD Card.5" MSP430.40 R13.1 RTC.18 | length 58.5
  Top Layer w0.254: v1(29,22.2) 29.023,22.223 30.528,22.223 MSP430.40 ; v1(43.577,21.123) 45.052,21.123 45.225,21.296 51.871,21.296 v1@53.275,22.7 ; 48.3,1 v1(48.3,7.675) ; R13.1 v1@51.94,16.85 ; v1@51.94,16.955 v1@51.94,16.85 ; v1(52.375,8.075) 54.05,9.75 54.05,16.075 53.275,16.85 v1(51.99,16.85) v1@51.94,16.85 ; v1(53.24,22.9) RTC.18
  Bottom Layer w0.254: v1(29,22.2) 31.2,22.2 32.281,21.119 43.573,21.119 v1(43.577,21.123) ; v1(48.3,7.675) 48.525,7.45 51.95,7.45 v1(52.375,8.075) ; v1@51.94,16.955 51.94,20.666 53.275,22.001 v1@53.275,22.7
NetP1_2: P1.2 Sensor.9 | length 18
  Top Layer w0.2: v1(20.234,18.709) Sensor.9
  Bottom Layer w0.254: P1.2 5.598,18.412 5.598,17.556 5.924,17.231 8.956,17.231 9.956,18.231 16.575,18.231 17.053,18.709 v1(20.234,18.709)
NetR17_2: R17.2 U_Det.1 | length 8.5
  Top Layer w0.254: R17.2@13.35,12.201 v1(14.951,12.201) ; v1(20.401,12.226) 21.5,12.226 21.673,12.053 U_Det.1
  Bottom Layer w0.254: v1@15,12.226 v1(20.401,12.226)
NetR19_2: R19.2 RTC.6 | length 3
  Top Layer w0.254: R19.2@48.85,37 48.85,36.9 49.4,36.35 49.4,34.242 RTC.6
NetR20_2: R20.2 R21.2 U_Det.2 | length 3.1
  Top Layer w0.254: R20.2@21,10.2 22.196,10.2 22.221,10.175 22.221,10.275 22.623,10.677 U_Det.2
SCLA: "Level Shifter.2" R22.1 Sensor.23 | length 4.3
  Top Layer w0.2: R22.1@18.5,24.575 19.15,23.925 19.575,23.925 19.821,23.679 Sensor.23@19.821,23.213
  Top Layer w0.254: 18.375,26.613 18.363,26.601 18.363,24.737 R22.1 R22.1@18.5,24.575
SDAA: "Level Shifter.3" R23.1 Sensor.24 | length 6.9
  Top Layer w0.2: v1(17.85,23.2) Sensor.24
  Top Layer w0.254: 19.025,26.613 19.123,26.515 19.123,25.577 19.5,25.2 v1@19.5,25.1 ; v1(19.611,25.1) 20.761,25.1 R23.1
  Bottom Layer w0.254: v1(17.85,23.2) v1@19.5,24.85
STAT1: 470.2@20.823,7.452 Laderegler.3 | length 20.1
  Top Layer w0.254: 470.2@20.823,7.452 v1(20.823,8.777) ; Laderegler.3 36.954,10.077 v1(37.25,9.781)
  Bottom Layer w0.254: v1(20.823,8.777) 21.642,9.596 29.405,9.596 29.59,9.781 v1(37.25,9.781)
STAT2: 470.2@22.623,7.452 Laderegler.4 | length 20.9
  Top Layer w0.254: 470.2@22.623,7.452 v1(22.623,8.777) ; Laderegler.4 35.446,10.6 37.9,10.6 v1(38.423,10.077)
  Bottom Layer w0.254: v1(22.623,8.777) 22.946,9.1 37.532,9.1 38.423,9.991 v1(38.423,10.077)
"Taster Pin": C6.2 MSP430.34 R5.1 Taster.1 | length 44.2
  Top Layer w0.254: Taster.1 26.1,59.18 C6.2 ; v1(25.875,31.9) 25.9,31.994 26.157,32.25 26.157,55.495 R5.1 C6.2@26.213,57 ; MSP430.34 32.3,31.2 32.3,31.3 v1@32.938,31.938
  Bottom Layer w0.254: v1(25.875,31.9) v1(32.975,31.9)
TCK: JTAG.7 MSP430.15 | length 51.4
  Top Layer w0.254: JTAG.7@5.5,33.8 JTAG.7 6.8,32.5 9.9,32.5 10.752,33.352 v1(12.476,33.352) ; MSP430.15 39.637,19.245 40.192,19.8 40.192,32.583 v1@39.618,33.158
  Bottom Layer w0.254: v1(12.476,33.352) v1(39.425,33.352)
TDI: JTAG.3 MSP430.13 | length 56.5
  Top Layer w0.254: JTAG.3@5.44,38.478 JTAG.3 ; MSP430.13 40.04,18.245 41,19.205 41,34.3 v1(40.575,34.725)
  Bottom Layer w0.254: JTAG.3 6.88,37.5 8.971,37.5 11.671,34.8 12,34.8 v1@40.575,34.8
TDO/TDI: JTAG.1 MSP430.12 | length 67.4
  Top Layer w0.254: JTAG.1@5.598,41.176 JTAG.1 ; v1(12.601,35.552) 12.601,36.301 13.8,37.5 13.8,42.6 v1(13.6,42.8) ; MSP430.12 36.75,17.7 40.3,17.7 41.5,18.9 v1@41.5,35.45
  Bottom Layer w0.254: JTAG.1 7.222,42.8 v1(13.6,42.8) ; v1(12.601,35.552) 12.667,35.486 13.251,35.486 13.331,35.406 40.857,35.406 40.872,35.391 41.442,35.391 v1@41.469,35.419
  other v1: 41.5,35.325
TEST: JTAG.8 MSP430.22 | length 42.5
  Top Layer w0.254: MSP430.22 37.473,22.768 38.068,22.768 39.7,24.4 39.7,26.3 39.4,26.6 39.4,31.975 v1(38.925,32.45)
  Bottom Layer w0.254: JTAG.8 9.259,32.581 38.794,32.581 v1(38.925,32.45)
TMS: JTAG.5 MSP430.14 | length 53.4
  Top Layer w0.254: JTAG.5@5.493,36.347 JTAG.5 ; MSP430.14 39.801,18.745 40.596,19.54 40.596,33.454 v1@40.2,33.85
  Bottom Layer w0.254: JTAG.5 7.04,34.8 9.3,34.8 10,34.1 v1@40,34.1
  other v1: 40,34.05
"VCC TARGET": JTAG.4 P5.3 | length 15.7
  Top Layer w0.254: JTAG.4 7,39.92 7,52.04 P5.3
  Bottom Layer w0.254: P5.3 P5.3@8.315,53.355
"VCC TOOL": JTAG.2 P5.1 | length 8.4
  Top Layer w0.254: JTAG.2 7.404,42.056 7.404,47.364 P5.1
  Bottom Layer w0.254: JTAG.2 JTAG.2@8.836,41.249 ; P5.1 P5.1@8.35,48.21
pads on no net: "SD Card.1" "SD Card.8" "SD Card.9" "SD Card.10" "SD Card.11" "SD Card.12" "SD Card.13" "SD Card.14" "SD Card.15" CR1225.1 J1.2 J1.3 J1.4 J1.6 J1.7 J1.8 J1.9 J1.10 J1.11 JTAG.6 JTAG.10 JTAG.12 JTAG.13 JTAG.14 Laderegler.10 MSP430.2 MSP430.3 MSP430.5 MSP430.6 MSP430.7 MSP430.8 MSP430.16 MSP430.17 MSP430.19 MSP430.24 MSP430.25 MSP430.26 MSP430.28 MSP430.29 MSP430.30 MSP430.33 MSP430.38 MSP430.39 MSP430.42 MSP430.43 MSP430.45 MSP430.46 RTC.2 RTC.3 RTC.5 RTC.20 Sensor.1 Sensor.2 Sensor.3 Sensor.4 Sensor.5 Sensor.6 Sensor.7 Sensor.11 Sensor.12 Sensor.14 Sensor.15 Sensor.16 Sensor.17 Sensor.19 Sensor.21 U_Det.4
copper on no net: | length 53.6
  Top Layer w0.254: v1(25.5,16.626) 26.026,16.1 31.4,16.1 32.227,16.927 32.227,17.522 32.25,17.545 ; v1@26.289,17.211 26.981,16.519 31.216,16.519 31.727,17.03 31.727,17.522 31.75,17.545 ; v1(27.775,22.7) 28.2,22.7 28.4,22.9 29.345,22.9 29.5,22.745 30.55,22.745 ; 32.15,47.7 32.753,47.097 ; 32.75,24.445 32.75,25.276 32.75,30.45 v1(33.5,31.2) ; 34.25,24.445 34.25,25.276 34.25,28.05 v1@34.95,28.75 ; 34.75,24.445 34.75,25.276 34.75,27.377 v1(35.373,28) ; 35.25,24.445 35.25,25.399 35.173,25.476 35.173,26.521 v1(35.75,27.098) ; 36.25,24.445 36.25,25.448 36.7,25.898 v1(36.7,26.6) ; 36.75,24.445 36.75,25.376 37.5,26.126 v1(37.5,27.1) ; 37.45,19.745 38.281,19.745 38.545,19.745 v1@38.7,19.9 ; 37.45,23.745 37.75,23.745 37.773,23.768 37.773,25.563 38.1,25.89 38.7,26.49 v1(38.7,27.098) ; 50.7,34.212 50.7,35.555 50.7,35.7 v1(50.9,35.9) ; 53.24,34.212 53.275,34.247 53.275,35.5 53.86,36.085 v1(54.285,36.085) ; 55.78,24.788 55.78,24.598 55.978,24.4 55.85,24.4 v1@55.85,22.9
  other v1: 40.825,12.9 26.3,17.222 38.65,19.975 55.878,22.901 34.9,28.8
  other v2: 4.5,4.5 61.5,4.5 4.5,58.5 61.5,58.5

## Polygon pours and split planes (outlines as drawn)
GND on Bottom Layer "Bottom Layer-No Net" (solid, pour order 26): 0,0 66,0 66,15 60,15 60,46 66,46 66,63 0,63
GND on Top Layer "Top Layer-No Net 3" (solid, pour order 24): 0,0 66,0 66,15 60,15 60,46 66,46 66,63 0,63

## Keep-outs
Keep-Out Layer:
  circle w0.254: c4.5,58.5 r3
  circle w0.254: c61.5,58.5 r3
  circle w0.254: c4.5,4.5 r3
  circle w0.254: c61.5,4.5 r3
  lines w0.254: 0,0 0,63 66,63 66,46 60,46 60,15 66,15 66,0 0,0

## Silkscreen, mask and mechanical layers (free items; w line width, h text height)
Top Overlay:
  circle w0.254: c18.6,42.8 r0.8
  circle w0.254: c18.45,46.37 r0.1
  circle w0.254: c18.45,46.37 r0.8
  circle w0.254: c43.9,46.8 r6.25
  lines w0.254: 18.073,42.3 19.073,43.3 ; 18.1,43.35 19.2,42.25 19.2,42.2 ; 18.473,49.02 18.973,49.52 ; 18.7,40.2 19.2,39.7 ; 18.973,47.093 18.973,48.77 18.973,49.52 ; 19.039,47.1 21.6,47.1 ; 19.473,49.02 18.973,49.52 ; 19.7,40.2 19.2,39.7 ; 21.1,46.6 21.6,47.1 ; 21.1,47.6 21.6,47.1 ; 21.2,41.7 21.7,42.2 ; 21.2,42.7 21.7,42.2 ; 19.2,39.7 19.2,40.45 19.2,42.2 ; 19.2,42.2 21.7,42.2 ; 2.471,20.929 2.471,46.329 11.471,46.329 11.471,20.929 2.471,20.929
  text "+" at 56.325,58.175 h1
  text "+" at 27.475,58.05 h1
  text "+" at 33.05,58.05 h1
  text "y" at 19.273,50.07 h1
  text "z" at 17.05,47.67 h1
  text "x" at 21.85,47.6 h1
  text "AG" at 21.95,45.37 h1.52
  text "x" at 21.95,42.7 h1
  text "z" at 17.5,40.8 h1
  text "M" at 22.4,39.5 h1.52
  text "y" at 18.45,38.47 h1
  text "+" at 64.725,8.375 h1
  text "JST-PH 2.0mm" at 60.05,8 h0.4
  text "O" at 16.675,2.025 h1
  text "I" at 7.815,1.975 h1
  text "+" at 30.05,0.125 h1
  text "+" at 22.621,0.1 h1
  text "+" at 26.45,0.1 h1
Bottom Overlay:
  text "MoveH V2_2" at 50.25,61.25 h1
Mechanical 1:
  the board outline again, w0.254

## Text inside footprints (layer, text, board x,y; h text height)
/PG: Mechanical 15 "+" at 23.347,1.086 h1 r180
"DIP SW": Top Overlay "8" at 8.5,57.575 h1.27 r180; Top Overlay "7" at 8.575,61.05 h1.27 r180; Top Overlay "1" at 19.812,61.048 h1.27 r180; Top Overlay "2" at 20.32,58.508 h1.27 r180
JTAG: Top Overlay "13" at 5.163,23.977 h1.27 r270; Top Overlay "14" at 7.703,23.977 h1.27 r270; Top Overlay "1" at 5.163,44.297 h1.27 r270; Top Overlay "2" at 7.703,44.297 h1.27 r270
STAT1: Mechanical 15 "+" at 27.072,1.111 h1 r180
STAT2: Mechanical 15 "+" at 30.772,1.136 h1 r180